# EAGLE board pcb v17 (EAGLE 9.7.0)
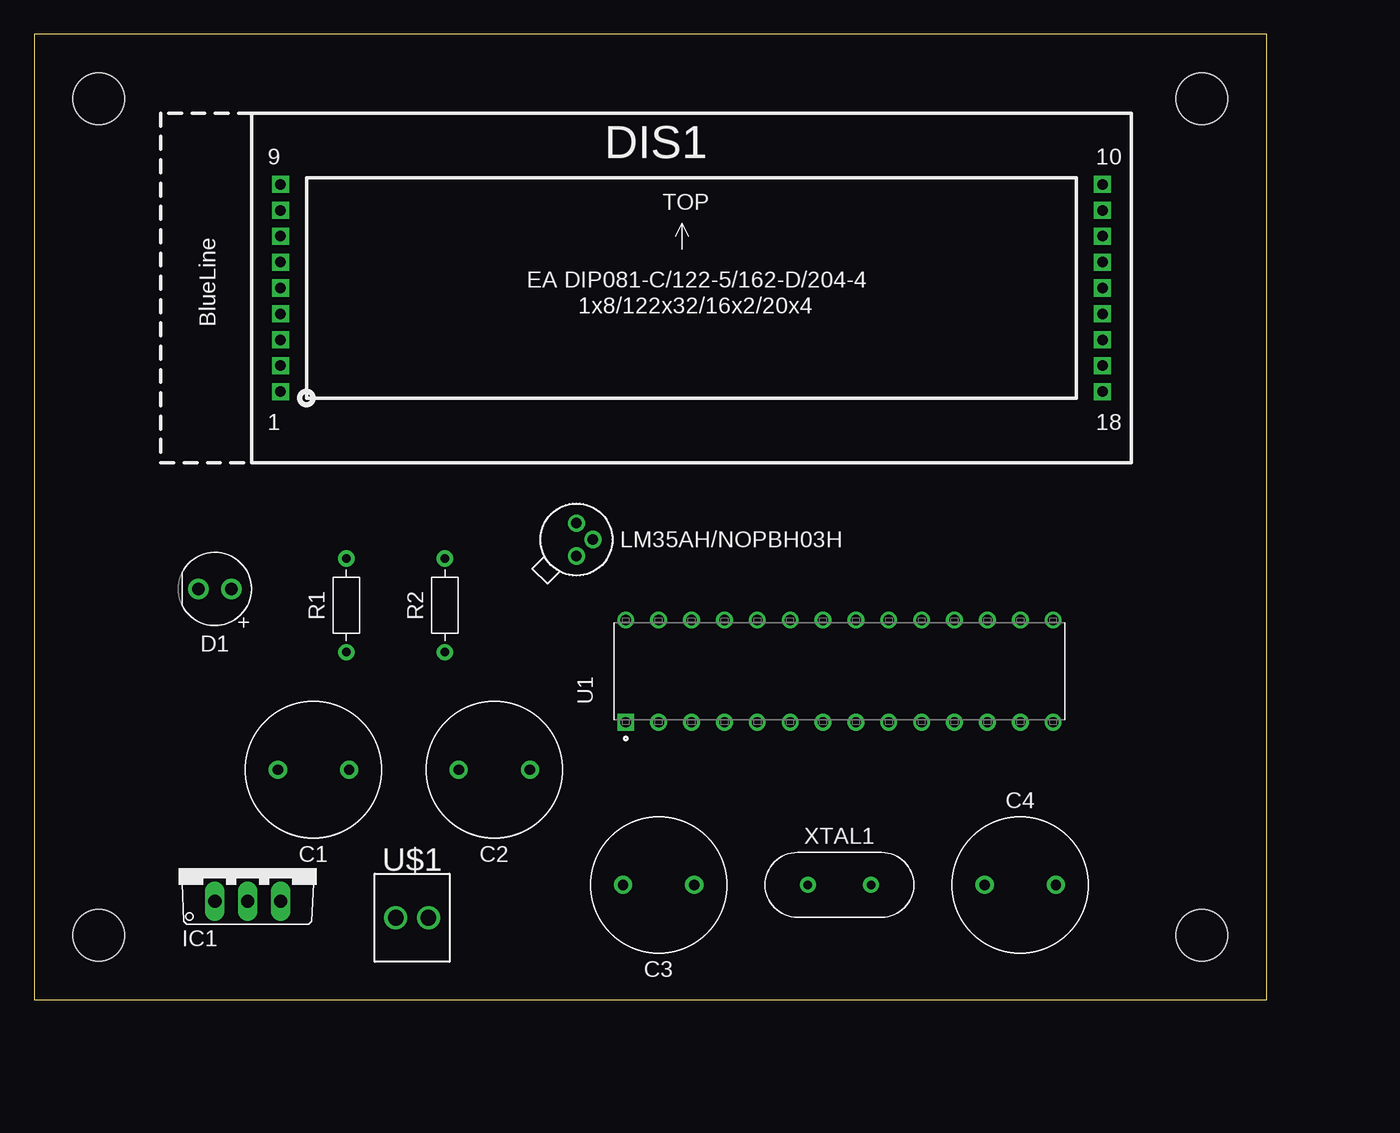
[diagram p0: board, top side]
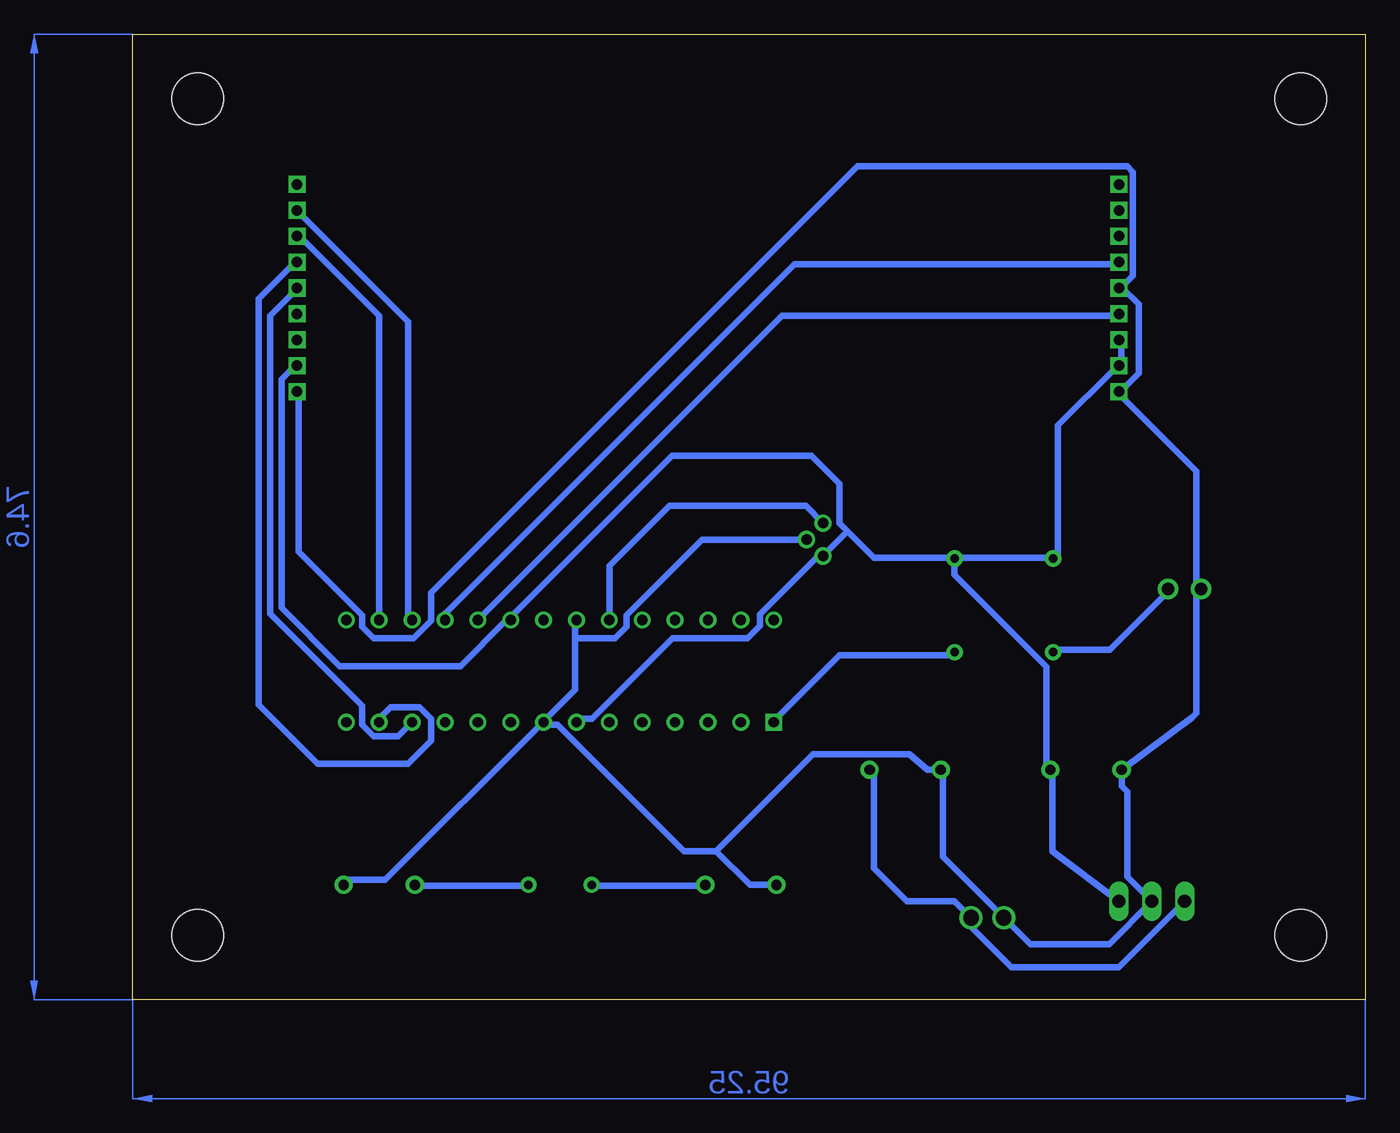
[diagram p1: board, bottom side, seen from below]

Size 95.23 x 74.6 mm. Coordinates in mm from the lower left corner, seen from the top.
Outline: 0,74.6 0,0 95.23,0 95.23,74.6 0,74.6
Copper layers (1*16): Top / Bottom
Stack-up Default Layer Stack: Top User Defined 0.035mm / Dielectric-1 User Defined 1.5mm / Bottom User Defined 0.035mm
Design rules "default *": minimum track width 20mil, minimum drill 0.35mm, track to track 15mil, track to pad 6mil, pad to pad 6mil, via to via 6mil, smd to smd 6mil, copper to edge 40mil, drill to drill 6mil, minimum pad ring 10mil, minimum via ring 8mil, stop-mask expansion 4mil, vias tented up to drill 0mil, thermal gap 10mil
Holes 4 mm at 5,69.6 90.23,69.6 90.23,5 5,5

## Footprints (pad centres in the part's own frame; a part is rotated, then mirrored left to right if it is on the bottom)
CAPRD550W60D1025H1250B = drill 0.8 pad 1.4: 1 -2.75,0; 2 2.75,0
LEDRD254W60D565H860B = drill 0.981 pad 1.581: 1 -1.27,0; 2 1.27,0
EA_DIP = drill 0.813 pad 1.27 square: 1 0,0; 2 0,2; 3 0,4; 4 0,6; 5 0,8; 6 0,10; 7 0,12; 8 0,14; 9 0,16; 10 63.5,16; 11 63.5,14; 12 63.5,12; 13 63.5,10; 14 63.5,8; 15 63.5,6; 16 63.5,4; 17 63.5,2; 18 63.5,0
TO220V = drill 1.016 long: 1 -2.54,-2.54; 2 0,-2.54; 3 2.54,-2.54
RESAD724W46L381D178B = drill 0.66 pad 1.26: 1 -3.62,0; 2 3.62,0
DIP-28 = drill 0.79 pad 1.19 square: 1 -3.95,16.51 | drill 0.79 pad 1.19: 2 -3.95,13.97; 3 -3.95,11.43; 4 -3.95,8.89; 5 -3.95,6.35; 6 -3.95,3.81; 7 -3.95,1.27; 8 -3.95,-1.27; 9 -3.95,-3.81; 10 -3.95,-6.35; 11 -3.95,-8.89; 12 -3.95,-11.43; 13 -3.95,-13.97; 14 -3.95,-16.51; 15 3.95,-16.51; 16 3.95,-13.97; 17 3.95,-11.43; 18 3.95,-8.89; 19 3.95,-6.35; 20 3.95,-3.81; 21 3.95,-1.27; 22 3.95,1.27; 23 3.95,3.81; 24 3.95,6.35; 25 3.95,8.89; 26 3.95,11.43; 27 3.95,13.97; 28 3.95,16.51
H03H = drill 0.813 pad 1.321: 1 0,-2.54; 2 1.27,-1.27; 3 0,0
TERMBLK_254-2N = drill 1.2: 1 0,0; 2 2.54,0
XTALRR488W45L1150T500H350B = drill 0.657 pad 1.257: 1 -2.44,0; 2 2.44,0

## Placement (x,y rotation side)
C1  0,1uF  [CAPRD550W60D1025H1250B]  21.59,17.78 180 top
C2  0,33uF  [CAPRD550W60D1025H1250B]  35.56,17.78 180 top
C3  22pF  [CAPRD550W60D1025H1250B]  48.26,8.89 180 top
C4  22pF  [CAPRD550W60D1025H1250B]  76.2,8.89 0 top
D1  LED_RED  [LEDRD254W60D565H860B]  13.97,31.75 180 top
DIS1  EA_DIP  [EA_DIP]  19.05,46.99 0 top
IC1  LM7805_TO220V  [TO220V]  16.51,10.16 0 top
R1  10k  [RESAD724W46L381D178B]  24.13,30.48 90 top
R2  10k  [RESAD724W46L381D178B]  31.75,30.48 90 top
U1  ATMEGA328P-PU  [DIP-28]  62.23,25.4 90 top
U2  LM35AH/NOPBH03H  [H03H]  41.91,36.83 0 top
U$1  2828XX-2282834-2  [TERMBLK_254-2N]  30.48,6.35 180 top
XTAL1  16MHz  [XTALRR488W45L1150T500H350B]  62.23,8.89 0 top

## Library data of the parts
C1-C4 = Tutorial - Fusion 360; CATEGORY: Capacitor
D1 = Opto-Electronic; CATEGORY: Opto-Electronic; SUB-CATEGORY: LED
DIS1 = display-lcd
IC1 = IC_Power-Management; CATEGORY: IC_Linear; DESCRIPTION: 5V Voltage Regulator; MANUFACTURER: Generic; MPN: Generic; SERIES: LM7805; SUB-CATEGORY: Voltage Regulator; TYPE: 5V
R1 R2 = Resistor; CATEGORY: Resistor; SUB-CATEGORY: Fixed
U1 = Microcontroller; CREATED_BY: PCBLayout.com; DIGIKEY_PART_NUMBER: ATMEGA328P-PU-ND; MANUFACTURER: Microchip Technology; MPN: ATMEGA328P-PU; PACKAGE: DIP-28
U2 = LM35AH; COPYRIGHT: Copyright (C) 2022 Ultra Librarian. All rights reserved.; MANUFACTURER_PART_NUMBER: LM35AH/NOPB; MFR_NAME: Texas Instruments; TYPE: LM35AH
U$1 = Connector
XTAL1 = Frequency-Source; CATEGORY: Frequency-Source; SUB-CATEGORY: Crystal-2Pin

## Nets
+V: C1.1 DIS1.2 DIS1.3 DIS1.17 IC1.3 R1.2 R2.2 U1.7 U1.20 U2.1
ADC0: U1.23 U2.3
ADC1: U1.10
ADC2: U1.9
ADC3: DIS1.4 U1.19
ADC4: DIS1.6 U1.18
ADC5: DIS1.11 U1.17
ADC6: DIS1.12 U1.16
ADC7: DIS1.13 U1.13
ADC8: U1.14
ADC9: DIS1.14 U1.12
D6: U1.15
GND: C1.2 C2.2 C3.2 C4.2 D1.2 DIS1.1 DIS1.5 DIS1.18 IC1.2 U1.8 U1.22 U2.2 U$1.2
N$1: C2.1 IC1.1 U$1.1
N$2: D1.1 R1.1
N$3: C3.1 XTAL1.1
N$4: C4.1 XTAL1.2
N$5: R2.1 U1.1

## Tracks (layer width: path | path; a pad name or v marks a point on that pad's centre or on a via)
+V
  Bottom 0.508: IC1.3 24.19,11.48 24.19,17.65 C1.1 24.64,18.1 24.64,25.72 31.75,32.83 R2.2 31.75,34.16 | DIS1.3 18.86,50.61 18.86,49.28 DIS1.2 19.3,48.83 23.75,44.39 23.75,34.16 R1.2 24.19,34.16 31.75,34.16 | U1.7 60.64,21.72 59.75,21.72 53.53,27.94 47.75,27.94 46.77,28.92 46.77,29.79 42.27,34.29 U2.1 40,36.2 | DIS1.17 82.87,48.83 83.76,47.94 83.76,30.29 79.25,25.78 69.91,25.78 66.42,29.27 U1.20 65.98,29.72 65.91,29.72 53.59,42.04 42.8,42.04 40.64,39.88 40.64,36.83 40,36.2 | 31.75,34.16 37.97,34.16 40,36.2
ADC0
  Bottom 0.508: U1.23 58.42,33.53 53.78,38.16 43.24,38.16 U2.3
ADC3
  Bottom 0.508: U1.19 45.08,52.83 19.3,52.83 DIS1.4
ADC4
  Bottom 0.508: U1.18 71.12,29.84 44.13,56.83 19.3,56.83 DIS1.6
ADC5
  Bottom 0.508: U1.17 73.98,29.72 73.98,52.39 82.42,60.83 DIS1.11
ADC6
  Bottom 0.508: U1.16 76.2,52.83 82.42,59.05 DIS1.12
ADC7
  Bottom 0.508: U1.13 76.2,21.72 75.31,22.61 73.09,22.61 72.2,21.72 72.2,20 73.98,18.22 80.96,18.22 85.53,22.8 85.53,54.17 82.87,56.83 DIS1.13
ADC9
  Bottom 0.508: U1.12 74.73,20.38 76.64,20.38 77.53,21.27 77.53,22.73 84.65,29.84 84.65,52.83 82.87,54.61 DIS1.14
GND
  Bottom 0.508: 61.09,27.94 61.09,23.94 63.31,21.72 U1.8 | 61.09,27.94 61.09,29.27 U1.22 | U2.2 51.24,35.56 57.09,29.72 57.09,28.83 57.98,27.94 61.09,27.94 | C4.2 78.87,9.27 75.76,9.27 63.75,21.27 U1.8 | 50.16,11.49 42.67,18.99 35.24,18.99 33.84,17.78 C2.2 32.64,17.65 32.64,11.05 U$1.2 25.91,4.32 19.8,4.32 16.51,7.61 IC1.2 18.42,9.52 18.42,16.09 18.84,16.51 C1.2 13.39,21.85 13.08,22.16 13.08,31.5 D1.2 13.08,31.94 13.08,40.83 18.86,46.61 DIS1.1 18.86,47.05 17.53,48.39 17.53,53.72 18.86,55.05 | 18.86,55.05 17.97,55.94 17.97,63.94 18.42,64.39 39.24,64.39 72.2,31.43 72.2,29.27 73.53,27.94 76.64,27.94 77.53,28.83 77.53,29.72 82.42,34.61 82.42,46.61 DIS1.18 | 18.86,55.05 DIS1.5 | 50.16,11.49 52.64,11.49 62.42,21.27 63.31,21.27 U1.8 | 50.16,11.49 47.56,8.89 C3.2
N$1
  Bottom 0.508: C2.1 37.97,17.65 37.97,10.16 35.43,7.62 31.75,7.62 U$1.1 30.48,5.65 27.38,2.55 27.37,2.54 19.05,2.54 IC1.1
N$2
  Bottom 0.508: R1.1 23.75,27.05 19.75,27.05 15.3,31.5 D1.1
N$3
  Bottom 0.508: XTAL1.1 59.75,8.83 51.31,8.83 C3.1
N$4
  Bottom 0.508: XTAL1.2 65.09,8.83 73.09,8.83 C4.1
N$5
  Bottom 0.508: R2.1 31.75,26.61 40.64,26.61 45.53,21.72 U1.1
(copper drawn outside any net)
  shapes: Bottom area x2